# Altium PCB PCB1.PcbDoc
Units mil, origin at the board's own origin, x right, y up, seen from the top; angles counter-clockwise.
Board outline 5200 x 1900 mil, 4 copper layers (Top Layer, GND Layer, 3V3 Layer, Bottom Layer), stack 23.756 mil thick; 43 components, 37 nets, 201 pads, 48 vias.
Unrouted connection lines stored in the file: 114.
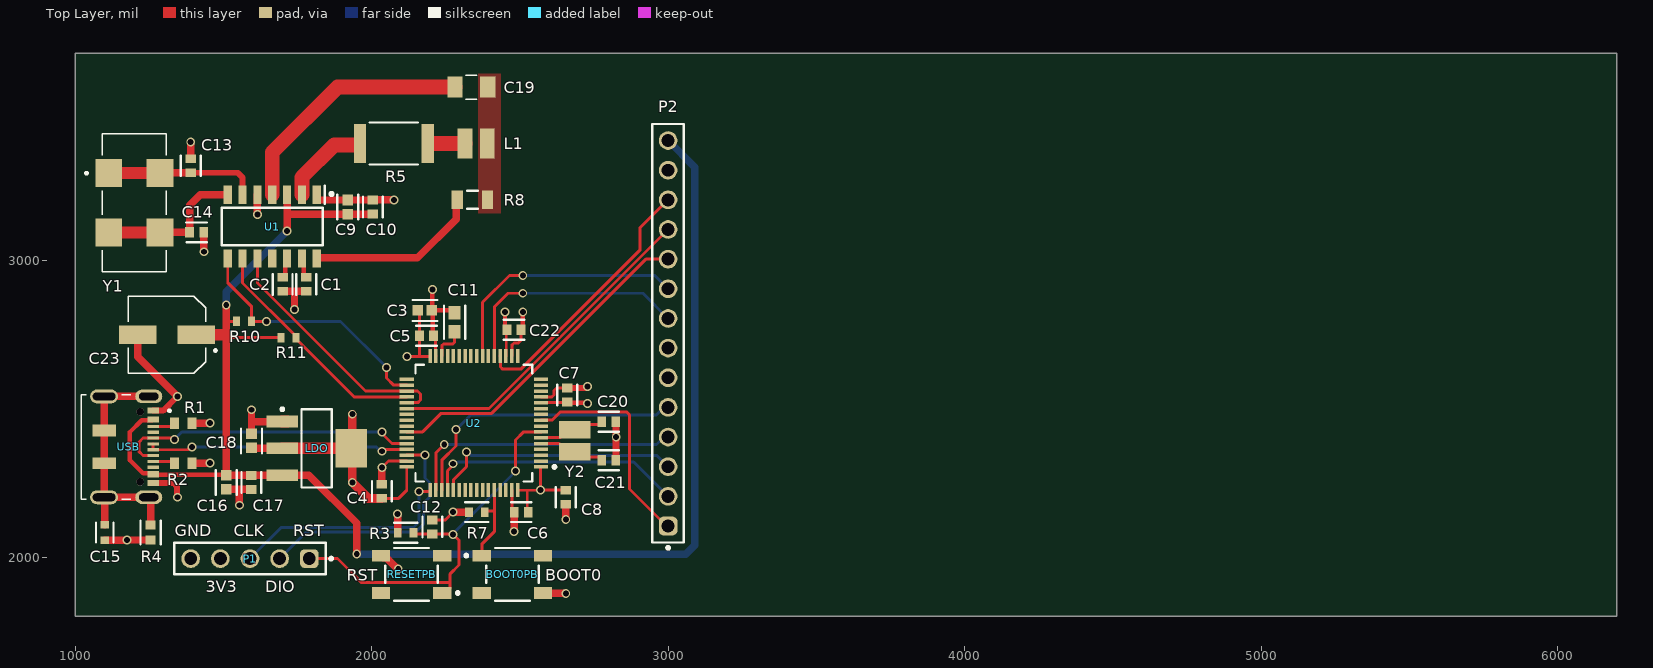
[diagram p0: Top Layer view]
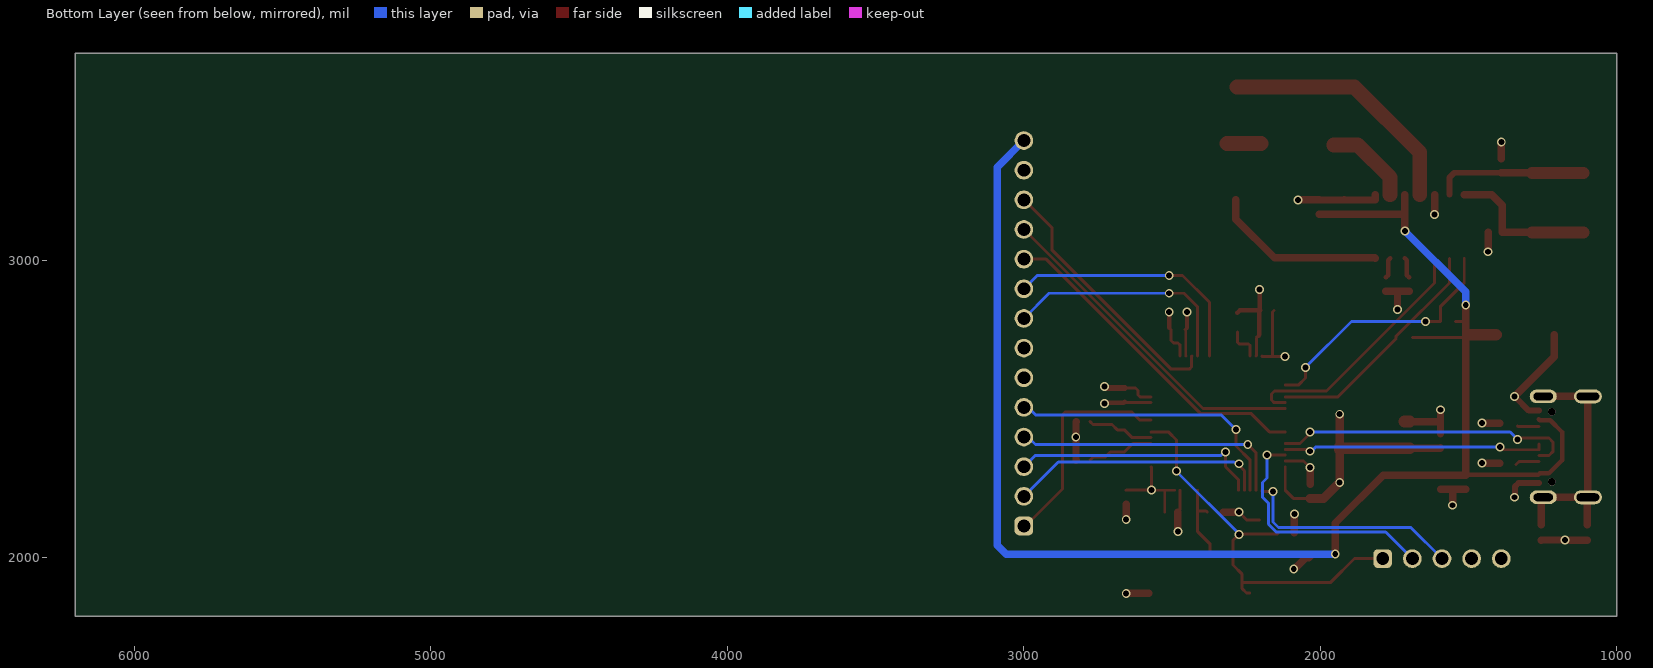
[diagram p1: Bottom Layer view, seen from below]
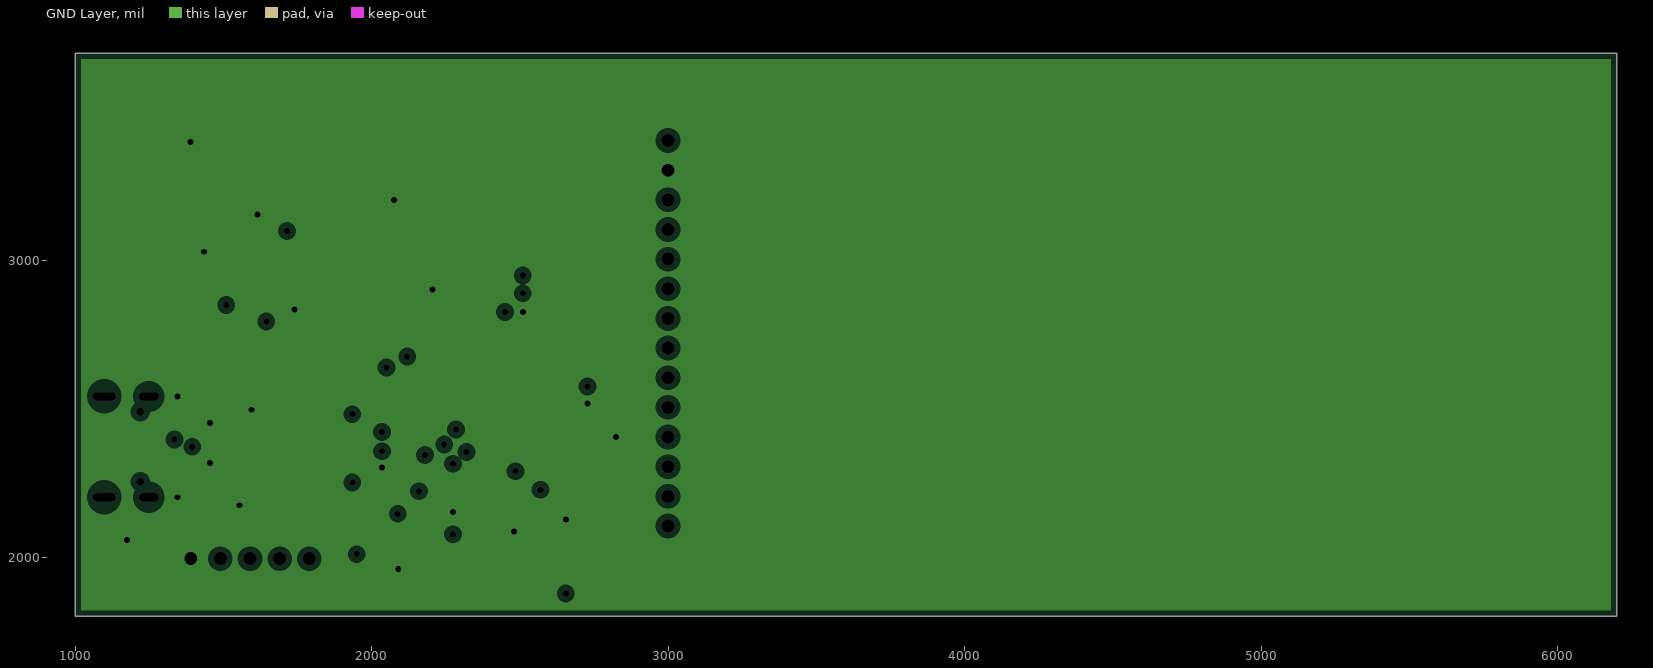
[diagram p2: GND Layer, clearances drawn from the general rule]
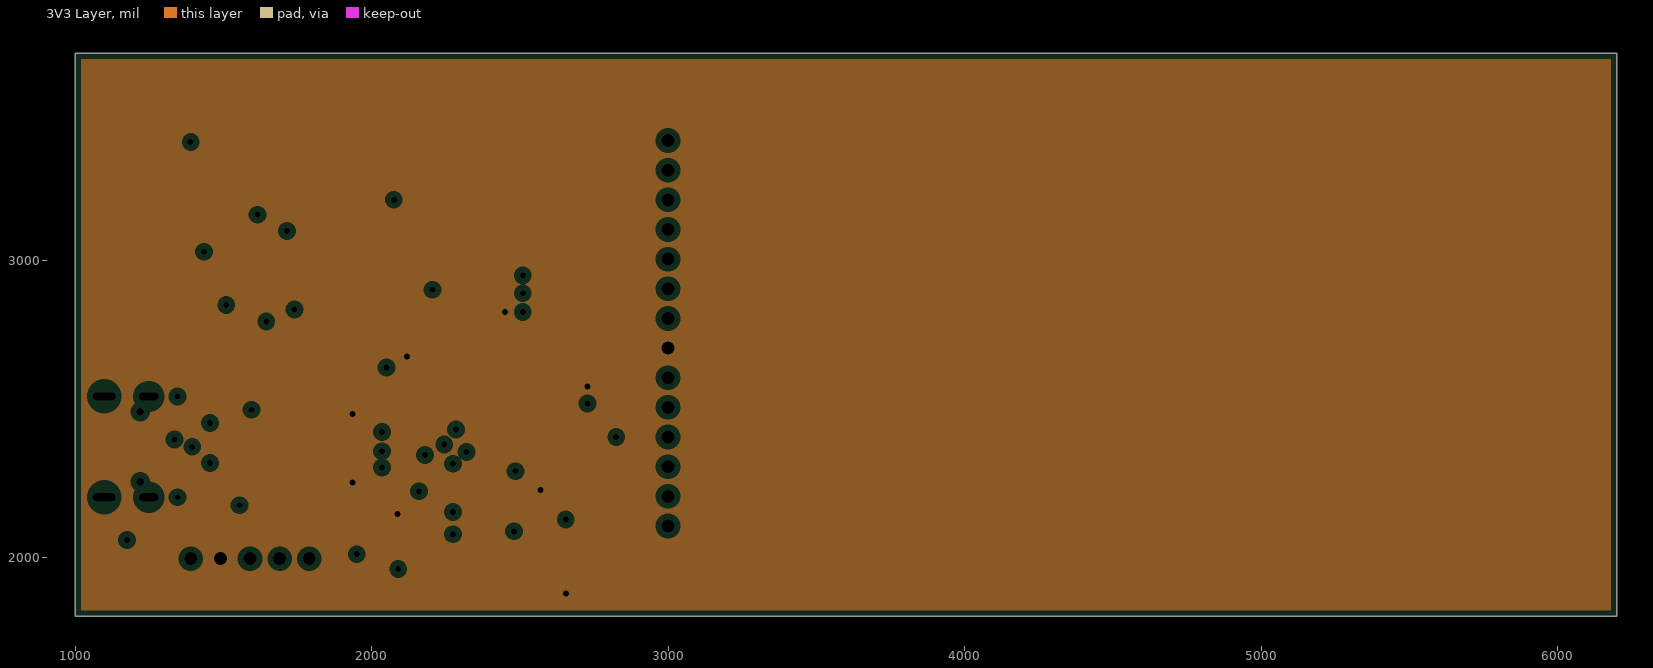
[diagram p3: 3V3 Layer, clearances drawn from the general rule]
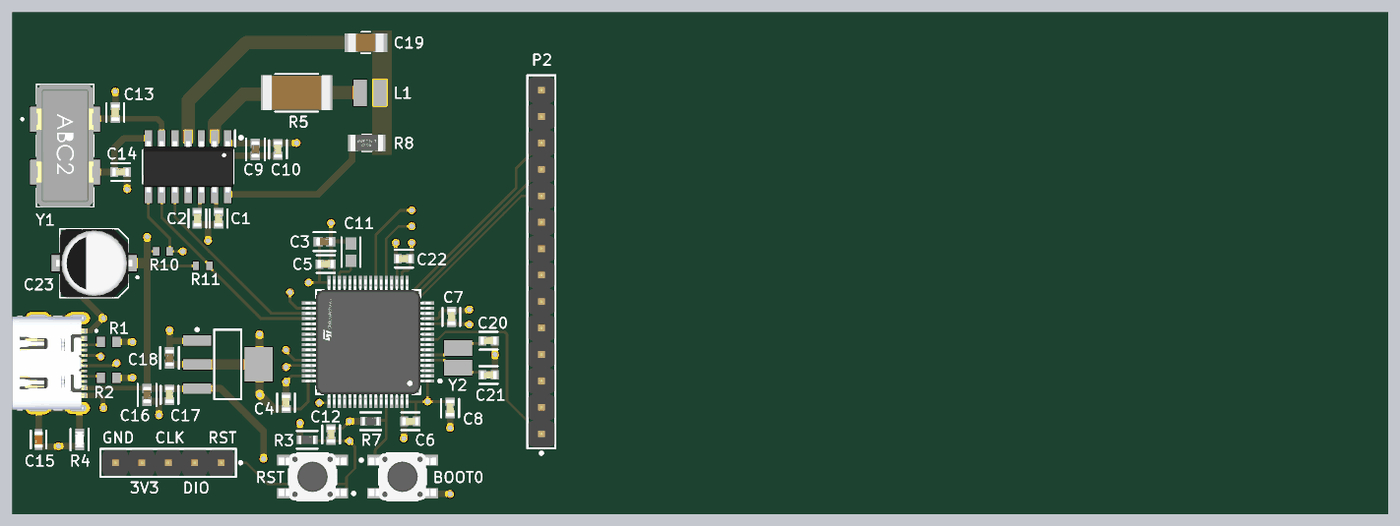
[diagram p4: 3D render of the assembled board from above, using the file's embedded part models]

## Layer stack, top to bottom
Top Solder: solder mask 0.4, Solder Resist, Dk 3.5
Top Layer: signal copper 1.4
Dielectric 2: prepreg 2.8, PP-006, Dk 4.1
GND Layer: plane copper 1.378, net GND
Dielectric 1: dielectric 12.6, FR-4, Dk 4.8
3V3 Layer: plane copper 1.378, net 3V3
Dielectric 3: prepreg 2.8, PP-006, Dk 4.1
Bottom Layer: signal copper 1.4
Bottom Solder: solder mask 0.4, Solder Resist, Dk 3.5

## Board outline
1000,1800 1000,3700 6200,3700 6200,1800

## Design rules (kind name [scope] priority, off if disabled: settings)
Clearance [All] p1: gap=5 ignorepadtopadclearanceinfootprint=FALSE
MinimumSolderMaskSliver [All] p1: minsoldermaskwidth=3.5
PlaneClearance [All] p1: clearance=20
PlaneConnect [All] p1: planeconnectstyle=Relief reliefexpansion=20 reliefentries=4 reliefconductorwidth=20 reliefairgap=10
PolygonConnect [All] p1: connectstyle=Direct reliefconductorwidth=10 reliefentries=4 polygonreliefangle="90 Angle" airgapwidth=10
RoutingVias [All] p1: holewidth=20 width=30 viastyle="Through Hole" minholewidth=10 minwidth=15 maxholewidth=30 maxwidth=40
SilkToSilkClearance [All] p1: silktosilkclearance=5
SilkToSolderMaskClearance [IsPad] p1: minsilkscreentomaskgap=3 clearancetoexposedcopper=TRUE
SolderMaskExpansion [All] p1: expansion=4 istentingtop=FALSE
SupplyNets "Schematic Supply Nets" [InNet('GND')] p1: voltage=0.000
Width "Power Width" [InNet('3V3') or InNet('GND') or InNet('USB5V') or InNet('USBSHLD')] p1: maxlimit=300 minlimit=10 preferedwidth=25
Width [All] p2: maxlimit=300 minlimit=10 preferedwidth=10
25 further rules are at their usual default settings.

## Components (designator, comment, footprint, x,y, rotation, side; value= is the part's Value field where it differs from the comment)
BOOT0PB "PTS647SM38SMTR2LFS" FP-PTS647SM38SMTR2LFS-MFG 2475,1942 r0 top
C1 "C0603C104K5RACTU" FP-C0603C-CF-MFG 1780,2920 r270 top value="0.10 μF"
C2 "C0603C104K5RACTU" FP-C0603C-CF-MFG 1700,2920 r270 top value="0.10 μF"
C3 "GRM188R6YA106MA73D" FP-GRM188-0_2-IPC_C 2180,2832 r0 top
C4 "C0603C104K5RACTU" FP-C0603C-CF-MFG 2035,2222 r90 top value="0.10 μF"
C5 "C0603C104K5RACTU" FP-C0603C-CF-MFG 2185,2747 r0 top value="0.10 μF"
C6 "C0603C104K5RACTU" FP-C0603C-CF-MFG 2505,2152 r180 top value="0.10 μF"
C7 "C0603C104K5RACTU" FP-C0603C-CF-MFG 2660,2547 r270 top value="0.10 μF"
C8 "C0603C104K5RACTU" FP-C0603C-CF-MFG 2655,2202 r270 top value="0.10 μF"
C9 "GRM188R6YA106MA73D" FP-GRM188-0_2-IPC_C 1919.31,3180.69 r90 top
C10 "C0603C104K5RACTU" FP-C0603C-CF-MFG 2004.31,3180.69 r90 top value="0.10 μF"
C11 "CL10A225KO8NNNC" FP-CL10-IPC_A 2280,2792 r90 top
C12 "C0603C104K5RACTU" FP-C0603C-CF-MFG 2205,2102 r90 top value="0.10 μF"
C13 "C0603C330J5GACTU" FP-C0603C-CF-MFG 1390,3320 r90 top value="33 pF"
C14 "C0603C330J5GACTU" FP-C0603C-CF-MFG 1410,3095 r0 top value="33 pF"
C15 "GRM1885C1H472JA01D" FP-GRM188-0_1-e0_2_0_5-MFG 1100,2083 r270 top
C16 "GRM188R6YA106MA73D" FP-GRM188-0_2-IPC_C 1510,2252 r270 top
C17 "C0603C104K5RACTU" FP-C0603C-CF-MFG 1595,2252 r270 top value="0.10 μF"
C18 "GRM188R6YA106MA73D" FP-GRM188-0_2-IPC_C 1595,2392 r90 top
C19 "C1206C472FBGACTU" CAPC340180_110N_KEM 2336.22,3585 r0 top
C20 "C0603C100J5GACTU" FP-C0603C-CF-MFG 2800,2457 r0 top value="10 pF"
C21 "C0603C100J5GACTU" FP-C0603C-CF-MFG 2800,2327 r0 top value="10 pF"
C22 "C0603C104K5RACTU" FP-C0603C-CF-MFG 2480,2767 r0 top value="0.10 μF"
C23 "EEEFK1C470P" CAP_EEEFK1C470P 1310,2750 r180 top value=47uF
L1 "CP-345UH-ID20" CP-345UH-ID20 2435,3295 r90 top
LDO "LD1117AS33TR" SOT-223_M 1815,2367 r0 top
P1 "61300511121" 61300511121 1590,1995 r180 top
P2 "61301411121" 61301411121 3000,2755 r90 top
R1 "RC0603FR-075K1L" RESC1608X55X25ML10T15 1365,2452 r180 top
R2 "RC0603FR-075K1L" RESC1608X55X25ML10T15 1365,2317 r180 top
R3 "RC0603FR-0710KL" FP-RC0603-0_55-IPC_C 2115,2082 r0 top
R4 "ERJ-3EKF1004V" FP-ERJ3EK-IPC_C 1255,2083 r270 top
R5 "352115RFT" RES_352115RFT_TEC 2075,3395 r0 top
R7 "RC0603FR-0710KL" FP-RC0603-0_55-IPC_C 2355,2152 r0 top
R8 "CRGCQ1206F330K" FP-CRGCQ1206-IPC_C 2340,3205 r180 top value=330KΩ
R10 "RC0603FR-072K2L" RESC1608X55X25LL10T15 1570,2795 r180 top
R11 "RC0603FR-072K2L" RESC1608X55X25LL10T15 1720,2740 r0 top
RESETPB "PTS647SM38SMTR2LFS" FP-PTS647SM38SMTR2LFS-MFG 2135,1942 r180 top
U1 "PCF7991AT_1081_M_1" SOIC127P600X175-14N 1665,3115 r270 top
U2 "STM32F401RET6" FP-LQFP64-5W-MFG 2345,2452 r180 top
USB "DX07S016JA1R1500" JAE_DX07S016JA1R1500 1220,2372 r270 top
Y1 "ABC2-4.000MHZ-4-T" XTAL_ABC2-4.000MHZ-4-T 1200,3195 r0 top
Y2 "NX3225GD-8MHZ-STD-CRA-3" NDK-NX3225GD-8MHZ-STD-CRA-3_V 2685,2392 r270 top

## Footprints (in the part's own frame and the unit in brackets; to place one, negate y for a bottom-side part, rotate by r counter-clockwise, add the part's x,y. Pads: shape width x height; smd on the part's side, far side on the other; paste and mask are expansions set on the pad)
61300511121 [mm] "Pin Header, pitch 2.54 mm, THT, Vertical, single row, 5p"
  rrect50% 1.6x1.6 hole 1.1: 1(-5.08,0)
  round 1.6 hole 1.1: 2(-2.54,0) 3(0,0) 4(2.54,0) 5(5.08,0)
  silkscreen extent -7.07,-1.35 6.5,1.35, body extent -6.35,-1.27 6.35,1.27, height 8.57
61301411121 [mm] "Pin Header, pitch 2.54 mm, THT, Vertical, single row, 14p"
  rrect50% 1.6x1.6 hole 1.1: 1(-16.51,0)
  round 1.6 hole 1.1: 2(-13.97,0) 3(-11.43,0) 4(-8.89,0) 5(-6.35,0) 6(-3.81,0) 7(-1.27,0) 8(1.27,0) 9(3.81,0) 10(6.35,0) 11(8.89,0) 12(11.43,0) 13(13.97,0) 14(16.51,0)
  silkscreen extent -18.5,-1.35 17.93,1.35, body extent -17.78,-1.27 17.78,1.27, height 8.57
CAP_EEEFK1C470P [mm]
  rect 3.2x1.6 smd: 1(-2.5,0) 2(2.5,0)
  silkscreen extent -4.25,-3.3 3.3,3.3, body extent -3.65,-3.3 3.65,3.3, height 5.8
CAPC340180_110N_KEM [mm]
  rect 1.306x1.8 smd paste+0 mask+0: 1(-1.403,0) 2(1.403,0)
  silkscreen extent -0.44,-1.03 0.44,1.03, body extent -1.7,-0.9 1.7,0.9, height 1.1
CP-345UH-ID20 [mil]
  rect 100x50 smd: 1(100,120) 2(100,45)
FP-C0603C-CF-MFG [mm]
  rect 0.75x0.9 smd paste+0 mask+0: 1(-0.6,0) 2(0.6,0)
  silkscreen extent -0.87,-0.85 0.88,0.85, body extent -1.2,-0.6 1.2,0.6, height 0.25
FP-CL10-IPC_A [mil]
  rect 45.6x39.85 smd paste+0 mask+0: 1(-32.56,0) 2(32.56,0)
  silkscreen extent -55,-36 55,36, body extent -75,-40 75,40, height 10
FP-CRGCQ1206-IPC_C [mil]
  rect 37.64x63.38 smd paste+0 mask+0: 1(-51.22,0) 2(51.22,0)
  silkscreen extent -18,-31 18,31, body extent -74,-37 74,37, height 10
FP-ERJ3EK-IPC_C [mil]
  rect 29.78x33.94 smd paste+0 mask+0: 1(-25.62,0) 2(25.62,0)
  silkscreen extent -41,-34 41,34, body extent -44,-23 44,23, height 10
FP-GRM188-0_1-e0_2_0_5-MFG [mm]
  rect 0.65x0.7 smd paste+0 mask+0: 1(-0.675,0) 2(0.675,0)
  silkscreen extent -0.85,-0.75 0.85,0.75, body extent -1.1,-0.55 1.1,0.55, height 0.25
FP-GRM188-0_2-IPC_C [mil]
  rect 35.63x35.68 smd paste+0 mask+0: 1(-23.64,0) 2(23.64,0)
  silkscreen extent -41,-35 41,35, body extent -45,-24 45,24, height 10
FP-LQFP64-5W-MFG [mm]
  rect 1.2x0.3 smd paste+0 mask+0: 1(-5.75,3.75) 2(-5.75,3.25) 3(-5.75,2.75) 4(-5.75,2.25) 5(-5.75,1.75) 6(-5.75,1.25) 7(-5.75,0.75) 8(-5.75,0.25) 9(-5.75,-0.25) 10(-5.75,-0.75) 11(-5.75,-1.25) 12(-5.75,-1.75) 13(-5.75,-2.25) 14(-5.75,-2.75) 15(-5.75,-3.25) 16(-5.75,-3.75) 33(5.75,-3.75) 34(5.75,-3.25) 35(5.75,-2.75) 36(5.75,-2.25) 37(5.75,-1.75) 38(5.75,-1.25) 39(5.75,-0.75) 40(5.75,-0.25) 41(5.75,0.25) 42(5.75,0.75) 43(5.75,1.25) 44(5.75,1.75) 45(5.75,2.25) 46(5.75,2.75) 47(5.75,3.25) 48(5.75,3.75)
  rect 0.3x1.2 smd paste+0 mask+0: 17(-3.75,-5.75) 18(-3.25,-5.75) 19(-2.75,-5.75) 20(-2.25,-5.75) 21(-1.75,-5.75) 22(-1.25,-5.75) 23(-0.75,-5.75) 24(-0.25,-5.75) 25(0.25,-5.75) 26(0.75,-5.75) 27(1.25,-5.75) 28(1.75,-5.75) 29(2.25,-5.75) 30(2.75,-5.75) 31(3.25,-5.75) 32(3.75,-5.75) 49(3.75,5.75) 50(3.25,5.75) 51(2.75,5.75) 52(2.25,5.75) 53(1.75,5.75) 54(1.25,5.75) 55(0.75,5.75) 56(0.25,5.75) 57(-0.25,5.75) 58(-0.75,5.75) 59(-1.25,5.75) 60(-1.75,5.75) 61(-2.25,5.75) 62(-2.75,5.75) 63(-3.25,5.75) 64(-3.75,5.75)
  silkscreen extent -7.02,-5 5,5, body extent -6.45,-6.45 6.45,6.45, height 0.25
FP-PTS647SM38SMTR2LFS-MFG [mm]
  rect 1.55x1 smd paste+0 mask+0: 1(-2.625,1.6) 2(2.625,1.6) 3(-2.625,-1.6) 4(2.625,-1.6)
  silkscreen extent -4.07,-2.25 2.25,2.25, body extent -3.5,-2.42 3.5,2.42, height 0.25
FP-RC0603-0_55-IPC_C [mil]
  rect 25.93x31.97 smd paste+0 mask+0: 1(-26.64,0) 2(26.64,0)
  silkscreen extent -40,-33 40,33, body extent -44,-22 44,22, height 10
JAE_DX07S016JA1R1500 [mm]
  rect 0.52x1 smd mask+0.051: 1(-3.1,1.1) 2(-2.35,1.1) 11(2.35,1.1) 12(3.1,1.1)
  rect 0.27x1 smd mask+0.051: 3(-1.75,1.1) 4(-1.25,1.1) 5(-0.75,1.1) 6(-0.25,1.1) 7(0.25,1.1) 8(0.75,1.1) 9(1.25,1.1) 10(1.75,1.1)
  rect 1x2 smd: S1(-1.4,-3.1) S2(1.4,-3.1)
  oval 1.158x2.316 hole 0.65 slot 1.65 at 90 deg: S3(-4.32,0.725) S4(4.32,0.725)
  oval 1.2x2.4 hole 0.65 slot 1.95 at 90 deg: S5(-4.32,-3.1) S6(4.32,-3.1)
  round 0.63 hole 0.63 unplated: ""(-3,0) ""(3,0)
  silkscreen extent -4.47,-5.05 4.47,2.6, body extent -4.47,-5.56 4.47,1.35, height 3.31
NDK-NX3225GD-8MHZ-STD-CRA-3_V [mm] "SMD, 2-Leads, Body 3.2x2.5mm"
  rect 1.5x2.7 smd: 1(-0.95,0) 2(0.95,0)
  body extent -1.6,-1.25 1.6,1.25, height 1
RES_352115RFT_TEC [mil]
  rect 41x132 smd paste+0 mask+0: 1(-114.47,0) 2(114.47,0)
  silkscreen extent -82,-71 82,71, body extent -127,-66 127,66, height 26
RESC1608X55X25LL10T15 [mm] "Chip Resistor, 2-Leads, Body 1.60x0.80mm, IPC High Density"
  rect 0.6x0.8 smd: 1(-0.65,0) 2(0.65,0)
  body extent -0.85,-0.45 0.85,0.45, height 0.55
RESC1608X55X25ML10T15 [mm] "Chip Resistor, 2-Leads, Body 1.60x0.80mm, IPC Low Density"
  rect 0.8x1 smd: 1(-0.75,0) 2(0.75,0)
  body extent -0.85,-0.45 0.85,0.45, height 0.55
SOIC127P600X175-14N [mm]
  rect 1.55x0.7 smd: 1(-2.725,3.81) 2(-2.725,2.54) 3(-2.725,1.27) 4(-2.725,0) 5(-2.725,-1.27) 6(-2.725,-2.54) 7(-2.725,-3.81) 8(2.725,-3.81) 9(2.725,-2.54) 10(2.725,-1.27) 11(2.725,0) 12(2.725,1.27) 13(2.725,2.54) 14(2.725,3.81)
  silkscreen extent -3.5,-4.33 1.6,4.51, body extent -3.03,-4.33 3.03,4.33, height 0.67
SOT-223_M [mm] "SOT223, 4-Leads, Body 6.5x3.5mm, Pitch 2.3mm, Lead Span 7mm, IPC Low Density"
  rect 2.7x1 smd: 1(-2.95,2.3) 2(-2.95,0) 3(-2.95,-2.3)
  rect 2.7x3.3 smd: 4(2.95,0)
  silkscreen extent -3.07,-3.35 1.3,3.47, body extent -1.85,-3.35 1.85,3.35, height 1.8
XTAL_ABC2-4.000MHZ-4-T [mm]
  rect 2.3x2.4 smd: 1(-2.2,2.54) 2(-2.2,-2.54) 3(2.2,-2.54) 4(2.2,2.54)
  silkscreen extent -4.2,-5.9 2.75,5.9, body extent -2.75,-5.9 2.75,5.9, height 2.09

## Part data
BOOT0PB RESETPB: library part CMP-10040-000031-1, "TACT 4.5 X 4.5, 3.8 MM H, 1.8N,", Max Operating Temperature=70°C, Min Operating Temperature=-20°C, Operating Force=180gf, Ratings=IP40, Actuator Type=Standard, Illumination Type=Non-Illuminated, Mechanical Life=100000Cycles, Mount="Surface Mount", Packaging="Cut Tape", Switch Function=Off-Mom, Switch Travel=0.25mm, Termination="Gull Wing", Throw Configuration=SPST
C1 C2 C4 C5 C6 C7 C8 C10 C12 C17 C22: library part CMP-2006-03061-2, "CAP CER 0.1UF 50V X7R 0603", Capacitance=100nF, Manufacturer=KEMET, Package=C0603C-CF, Temperature="-55°C to +125°C", Temperature Characteristic=X7R, Temperature Coefficient=30ppm/°C, Temperature Range High=+125°C, Temperature Range Low=-55°C, Tolerance=0.1, Voltage Rating="50 V", Automotive=Yes, Automotive Grade="Grade 1", Category=Cap, ComponentLink2Description=Datasheet, ComponentLink2URL=https://api.kemet.com/component-edge/download/datasheet/C0603C100J5GACAUTO.pdf, Device Class L1="Passive Components", Device Class L2=Capacitors, Device Class L3="Ceramic Capacitors", Digikey Description="CAP CER 0.1UF 50V X7R 0603", Height=0.87mm, Lead Free=Yes, Manufacturer Part Number=C0603C104K5RACTU, Material=Ceramic, Octopart=https://octopart.com/c0603c104k5ractu-kemet-139244, RoHS=TRUE
C3 C9 C16 C18: library part CMP-06035-045466-1, "Chip Multilayer Ceramic Capacitors for General Purpose, 0603, 10uF, X5R, 15%, 20%, 35V", Capacitance=10uF, Case Code (Imperial)=0603, Case Code (Metric)=1608, Dielectric=X5R, Max Operating Temperature=85°C, Min Operating Temperature=-55°C, Tolerance=20%, Voltage Rating=35V, Case/Package=0603, Length=0.063inch, Mount="Surface Mount", Packaging="Tape and Reel", Thickness=0.039inch, Voltage Rating (DC)=35V, Width=0.031inch
C11: library part CMP-13271-000835-1, "Cap Ceramic 2.2uF 16V X5R ±10% Pad SMD 0603 +85°C T/R", Capacitance=2.2uF, Case Code (Imperial)=0603, Case Code (Metric)=1608, Dielectric=X5R, Max Operating Temperature=85°C, Min Operating Temperature=-55°C, Package Quantity=4000, Tolerance=10%, Voltage=16V, Case/Package=0603, Contact Plating=Tin, Depth=0.8mm, Height=0.8mm, Lead Free="Lead Free", Length=1.6mm, Material=Ceramic, Mount="Surface Mount", Packaging="Tape and Reel", Radiation Hardening=No, Thickness=0.035inch, Voltage Rating=16V, Voltage Rating (DC)=16V, Width=0.031inch
C13 C14: library part CMP-2006-03168-3, "Capacitor; Ceramic; Cap; 33.0pF; Tol 5%; SMT; Vol-Rtg 50V; C0G; Tape and Reel", Capacitance="33 pF", Manufacturer=KEMET, Package=C0603C-CF, Temperature="-55°C to +125°C", Temperature Characteristic=C0G, Temperature Coefficient=30ppm/°C, Temperature Range High=+125°C, Temperature Range Low=-55°C, Tolerance=0.05, Voltage Rating="50 V", Automotive=Yes, Automotive Grade="Grade 1", Category=Cap, ComponentLink2Description=Datasheet, ComponentLink2URL=https://api.kemet.com/component-edge/download/datasheet/C0603C100J5GACAUTO.pdf, Device Class L1="Passive Components", Device Class L2=Capacitors, Device Class L3="Ceramic Capacitors", Digikey Description="Capacitor; Ceramic; Cap; 33.0pF; Tol 5%; SMT; Vol-Rtg 50V; C0G; Tape and Reel", Height=0.87mm, Lead Free=Yes, Manufacturer Part Number=C0603C330J5GACTU, Material=Ceramic, Mouser Description="Capacitor; Ceramic; Cap; 33.0pF; Tol 5%; SMT; Vol-Rtg 50V; C0G; Tape and Reel", Octopart=https://octopart.com/c0603c330j5gactu-kemet-87666, RoHS=TRUE
C15: library part CMP-2006-02564-2, "Chip Multilayer Ceramic Capacitors for General Purpose, 0603, 4700pF, C0G, 30ppm/°C, 5%, 50V", Capacitance=4.7nF, Case Code (Imperial)=0603, Case Code (Metric)=1608, Dielectric=C0G, Max Operating Temperature=125°C, Min Operating Temperature=-55°C, Package Quantity=4000, Tolerance=5%, Voltage Rating=50V, Case/Package=0603, Height=0.8mm, Lead Free="Lead Free", Length=1.6mm, Material=Ceramic, Mount="Surface Mount", Packaging="Tape and Reel", REACH SVHC="No SVHC", Termination=SMD/SMT, Thickness=0.035inch, Voltage Rating (DC)=50V, Width=0.8mm
C19: library part CMP-001-00090-1, "SMD Comm C0G HV, Ceramic, 4700 pF, 1%, 630 VDC, C0G, SMD, MLCC, Ultra-Stable, Low Loss, Class I, 1206", Manufacturer_Name=Kemet, Copyright="Copyright (C) 2026 Ultra Librarian. All rights reserved.", Datasheet=https://content.kemet.com/datasheets/KEM_C1009_C0G_HV_SMD.pdf, Design Item ID=C1206C472FBGACTU, Manufacturer_Part_Number=C1206C472FBGACTU, Parameter 1=4.7nF, Source=C1206C472FBGACTU.SchLib
C20 C21: library part CMP-2006-02999-3, "CAP CER 10PF 50V C0G/NP0 0603", Capacitance="10 pF", Manufacturer=KEMET, Package=C0603C-CF, Temperature="-55°C to +125°C", Temperature Characteristic=C0G, Temperature Coefficient=30ppm/°C, Temperature Range High=+125°C, Temperature Range Low=-55°C, Tolerance=0.05, Voltage Rating="50 V", Automotive=Yes, Automotive Grade="Grade 1", Category=Cap, ComponentLink2Description=Datasheet, ComponentLink2URL=https://api.kemet.com/component-edge/download/datasheet/C0603C100J5GACAUTO.pdf, Device Class L1="Passive Components", Device Class L2=Capacitors, Device Class L3="Ceramic Capacitors", Digikey Description="CAP CER 10PF 50V C0G/NP0 0603", Height=0.87mm, Lead Free=Yes, Manufacturer Part Number=C0603C100J5GACTU, Material=Ceramic, Mouser Description="Multilayer Ceramic Capacitors MLCC - SMD/SMT 50volts 10pF C0G 5%", Octopart=https://octopart.com/c0603c100j5gactu-kemet-138281, RoHS=TRUE
C23: "47ÂµF 16V Aluminum Electrolytic Capacitors Radial, Can - SMD 2000 Hrs @ 105Â°C", Package="RADIAL-2 Panasonic", Check_prices=https://www.snapeda.com/parts/EEE-FK1C470P/Panasonic/view-part/?ref=eda, MF="Panasonic Electronic", MP=EEE-FK1C470P, SnapEDA_Link=https://www.snapeda.com/parts/EEE-FK1C470P/Panasonic/view-part/?ref=snap
LDO: library part CMP-0244-00316-1, "1A, Low Drop Positive Voltage Regulator, 3.3V, 4-Pin SOT-223, Tape and Reel", ComponentLink1Description="Manufacturer URL", ComponentLink1URL=http://www.st.com, ComponentLink2Description=Datasheet, ComponentLink2URL=http://www.st.com/internet/com/TECHNICAL_RESOURCES/TECHNICAL_LITERATURE/DATASHEET/CD00002116.pdf, DatasheetVersion=2/12/2011, PackageDescription="4-Pin SOT-223 Package, 6.5 x 3.5 mm Body, 2.3 mm Pitch, 7 mm Lead Span", PackageReference=SOT-223, PackageVersion=2010
P1: library part CMP-1502-01068-4, "THT Vertical Pin Header WR-PHD, Pitch 2.54 mm, Single Row, 5 pins", Color=Black, Contact Resistance=20mΩ, Current Rating=3A, Max Operating Temperature=105°C, Min Operating Temperature=-40°C, Operating Supply Voltage=250V, Connector Type="Male Pin", Contact Material=Gold, Contact Mating Length=5.9944mm, Contact Plating=Gold, Gender=Male, Height=8.89mm, Lead Free="Lead Free", Lead Pitch=2.54mm, Mount="Through Hole", Number of Contacts=5, Number of Pins=5, Number of Positions=5, Number of Rows=1, Orientation=Vertical, Packaging=Bulk, Pitch=2.54mm, RoHS=Compliant, Termination=Solder, Voltage Rating=250V
P2: library part CMP-1502-01091-4, "THT Vertical Pin Header WR-PHD, Pitch 2.54 mm, Single Row, 14 pins", Color=Black, Contact Resistance=20mΩ, Current Rating=3A, Max Operating Temperature=105°C, Min Operating Temperature=-40°C, Operating Supply Voltage=250V, Connector Type="Male Pin", Contact Material=Gold, Contact Mating Length=5.9944mm, Contact Plating=Gold, Gender=Male, Height=8.89mm, Lead Free="Lead Free", Lead Pitch=2.54mm, Mount="Through Hole", Number of Contacts=14, Number of Pins=14, Number of Positions=14, Number of Rows=1, Orientation=Vertical, Packaging=Bulk, Pitch=2.54mm, RoHS=Compliant, Termination=Solder, Voltage Rating=250V
R1 R2: library part CMP-2000-04091-1, Manufacturer=Yageo, Parameter 1=5.1kR, Part Number=RC0603FR-075K1L
R3 R7: library part CMP-2100-03664-2, "RES 10K OHM 1% 1/10W 0603", Case Code (Imperial)=0603, Case Code (Metric)=1608, Max Operating Temperature=155°C, Max Power Dissipation=100mW, Min Operating Temperature=-55°C, Resistance=10kR, Resistance Tolerance=1%, Resistor Type="Thick Film", Temperature Coefficient=100ppm/°C, Voltage Rating=75V, Voltage Rating (DC)=50V, Case/Package=0603, Construction=Rectangular, Depth=0.8mm, Features="Moisture Resistant", Height=0.45mm, Lead Free="Lead Free", Lead Pitch=0.3mm, Length=1.6mm, Military Standard=Not, Number of Pins=2, Number of Terminations=2, Packaging="Tape and Reel", Power Rating=100mW, RoHS Compliant=Yes, Series=RC, Size Code=0603, Termination=SMD/SMT, Tolerance=1%, Weight=7.1E-05oz, Width=0.8mm
R4: library part CMP-1012-00849-3, "RES SMD 1M OHM 1% 1/10W 0603", Case Code (Imperial)=0603, Case Code (Metric)=1608, Max Operating Temperature=155°C, Max Power Dissipation=100mW, Min Operating Temperature=-55°C, Package Quantity=1, Resistance=1MR, Resistance Tolerance=1%, Resistor Type="Thick Film", Temperature Coefficient=100ppm/°C, Voltage Rating=75V, Case/Package=0603, Construction=Rectangular, Contact Plating=Tin, Depth=0.8mm, Features="Automotive AEC-Q200", Height=0.022inch, Lead Free="Lead Free", Length=1.6mm, Military Standard=Not, Mount="Surface Mount", Number of Pins=2, Number of Terminations=2, Packaging="Tape and Reel", Power Rating=100mW, Radiation Hardening=No, REACH SVHC="No SVHC", RoHS Compliant=Yes, Series=ERJ, Size Code=0603, Termination=SMD/SMT, Tolerance=1%, Voltage Rating (DC)=75V, Width=0.8mm
R5: library part CMP-009-00183-1, "3521 15R 1% 2W", Manufacturer_Name="TE Connectivity", Copyright="Copyright (C) 2026 Ultra Librarian. All rights reserved.", Datasheet=https://www.te.com/commerce/DocumentDelivery/DDEController?Action=srchrtrv&DocNm=9-1773463-5&DocType=Data+Sheet&DocLang=English&PartCntxt=2176070-5&DocFormat=pdf, Design Item ID=352115RFT, Manufacturer_Part_Number=352115RFT, Parameter 1=15R, Source=352115RFT.SchLib
R8: library part CMP-03211-007819-1, "CRGCQ1206 330KΩ 0.25W 1% ±100ppm/°C 200V", Ambient Temperature Range High=+70°C, Manufacturer="TE Connectivity", Package=CRGCQ1206, Power Rating=0.25W, Resistance=330KΩ, Temperature="-55°C to +155°C", Temperature Coefficient=±100ppm/°C, Temperature Range High=+155°C, Temperature Range Low=-55°C, Tolerance=0.01, Voltage Rating=200V, Automotive=Yes, Automotive Grade="Grade 1255", Category=Res, ComponentLink2Description=Datasheet, ComponentLink2URL=https://www.te.com/commerce/DocumentDelivery/DDEController?Action=showdoc&DocId=Data+Sheet%7F1773204-3%7F1%7Fpdf%7FEnglish%7FENG_DS_1773204-3_1.pdf%7F4-2176347-1264, Composition="Thick Film", Device Class L1="Passive Components", Device Class L2=Resistors, Device Class L3="Chip SMD Resistors", Height=0.65mm, Ipc Land Pattern Name=RESC310155X55, Lead Free=Yes, Manufacturer Part Number=CRGCQ1206F330K, Octopart=https://octopart.com/crgcq1206f330k-te+connectivity-91018273, RoHS=TRUE, Series=CRGCQ
R10 R11: library part CMP-2000-06934-1, "Thick Film Resistor, 2.2 KOhm, 100 mW, 50 V, +/- 1%, -55 to 155 degC, 2-Pin SMD (0603), RoHS, Tape and Reel", Case Code - in=0603, Case Code - mm=1608, Manufacturer=Yageo, Operating Temperature Range=-55Cto+155C, Package Description="2-Pin Surface Mount Device, Body 1.6 x 0.8 mm", Power Rating=100mW, Resistance=2.2kR, Temperature Coefficient=100PPM/C, Tolerance=1%, Voltage Rating=50V, Datasheet URL=http://www.yageo.com/documents/recent/PYu-RC_Group_51_RoHS_L_7.pdf, Datasheet Version="Rev. 7, 05/2017", Manufacturer URL=http://www.yageo.com/, Mounting Technology=SurfaceMount, Package Reference=0603, Packaging=Reel, Product=ThickFilmResistorsGeneralPurpose, Series=RC, Termination Style=SMD/SMT
U1: library part CMP-081-000000-1, "IC REMOTE KEYLESS ENTRY 14SOIC", Manufacturer_Name=NXP, Manufacturer_Part_Number=PCF7991AT/1081/M:1, Datasheet Link=https://www.farnell.com/datasheets/2353677.pdf, Design Item ID=PCF7991AT_1081_M_1, Geometry.Height=1.75mm, Source=PCF7991AT_1081_M_1.SchLib
U2: library part CMP-12105-000004-1, "IC MCU 32BIT 512KB FLASH 64LQFP", Ambient Temperature Range High=+85°C, Ambient Temperature Range Low=-40°C, Frequency=84MHz, Manufacturer=STMicroelectronics, Max Junction Temp=+105°C, Max Supply Voltage=3.6V, Min Supply Voltage=1.65V, Package=LQFP64-5W, Temperature="-40°C to +105°C", Automotive=No, Category=IC, ComponentLink2Description=Datasheet, ComponentLink2URL=https://www.st.com/resource/en/datasheet/stm32f401re.pdf, Core Architecture="ARM Cortex-M4", Data Bus Width=32bits, Device Class L1="Integrated Circuits (ICs)", Device Class L2="Embedded Processors and Controllers", Device Class L3=Microcontrollers, Digikey Description="IC MCU 32BIT 512KB FLASH 64LQFP", Height=1.6mm, Interface=I2C,SPI,USART,USB,IrDA,I2S,SMBus,Other, Ipc Land Pattern Name=QFP50P1200X1200X160-64, Lead Free=Yes, Manufacturer Part Number=STM32F401RET6, Memory Size=512KBytes, Memory Type=FLASH, Mouser Description="ARM Microcontrollers - MCU 16/32-BITS MICROS", Number Of A/D Converters=1, Number Of Adc Channels=12, Number Of Cores=1, Number Of I2C Channels=3, Number Of I/Os=50, Number Of Pwm Channels=23, Number Of Spi Channels=3, Number Of Timers/Counters=8, Number Of Uart Channels=3, Number Of Usb Channels=1, Octopart=https://octopart.com/stm32f401ret6-stmicroelectronics-34185993, Ram Size=96KBytes, RoHS=TRUE, Standoff Height=0.05mm, Temperature Range High=+105°C, Temperature Range Low=-40°C
USB: "USB-C (USB TYPE-C) USB 2.0 Receptacle Connector 24 (16+8 Dummy) Position Surface Mount, Right Angle; Through Hole", Package=None, Availability=Unavailable, MP=DX07S016JA1R1500, Price=None
Y1: Package=None, Availability=Unavailable, MP=ABC2-4.000MHZ-4-T, Price=None
Y2: library part CMP-2000-07595-1, "Crystal Unit, 8 MHz, 8 pF, -40 to 150 degC, 2-Pin SMD, RoHS, Tape and Reel", Case/Package=SMD/SMT, ESR (Equivalent Series Resistance)=500Ohm, Frequency=8MHz, Frequency Stability=150ppm, Frequency Tolerance=50ppm, Load Capacitance=8pF, Manufacturer=NDK, Max Operating Temperature=150degC, Min Operating Temperature=-40degC, Package Description="2-Pin Surface Mount Device, Body 3.2 x 2.5 mm", Package Quantity=3000, Datasheet URL=http://www.ndk.com/images/products/catalog/c_NX3225GD-STD-CRA-3_e.pdf, Datasheet Version=11/2016, Height=0.039inch, Length=0.126inch, Manufacturer URL=http://www.ndk.com/en/, Mount=SurfaceMount, Mounting Technology=SurfaceMount, Number of Pins=2, Package Reference=NX3225GD-8MHZ-STD-CRA-3, Packaging=TapeandReel, RoHSCompliant=True, Width=0.098inch
L1: Parameter 1=345uH

## Via types
v1: diameter 30, hole 20, Top Layer to Bottom Layer, 48 vias

## Nets (pads, with @x,y where several pads share a name; then routed paths per layer and width w, separated by ;. In a path a pad name is that pad's centre, name@x,y a point inside that pad or via, vN(x,y) a via of type N, cw(c..) or ccw(c..) an arc to the next point about the centre after c; other vN are vias at no path point)
3V3: BOOT0PB.4 C3.1 C4.1 C5.1 C6.1 C7.1 C8.1 C18.1 C22.1 LDO.2 LDO.4 P1.4 P2.7 R3.1 U2.1 U2.13 U2.19 U2.32 U2.48 U2.64 | length 1884.8
  Top Layer w10: C4.1 2091.38,2198.38 2118.62,2225.62 U2.48 ; v1(2120,2677) 2158.23,2677 ; C3.1 2161.38,2826.98 C5.1 2161.38,2680.15 2158.23,2677 ; U2.32 2197.36,2677.91 2196.46,2677 2158.23,2677 ; C22.1@2450,2773.38 C22.1 ; U2.19 2454.17,2679.28 C22.1@2454.17,2764.8 ; U2.64 2568.62,2225.62 v1(2570,2227) ; C6.1@2525,2152 2525,2222 ; U2.1 2570.91,2304.36 2570,2303.46 v1(2570,2227) ; U2.13 2608.58,2540.58 2615,2547 2615,2562 2623.62,2570.62 C7.1 ; C8.1 2654.31,2226.31 2570.69,2226.31 v1(2570,2227)
  Top Layer w15: C22.1@2450,2773.38 v1(2450,2827)
  Top Layer w20: C7.1 2720.92,2570.62 2725.29,2575 v1(2728,2575)
  Top Layer w25: C18.1 1595.68,2367.68 1698.18,2367.68 LDO.2 ; v1(2088,2146) 2088.18,2145.82 2088.18,2082.18 R3.1 ; BOOT0PB.4 2579.4,1877.96 2654.04,1877.96 v1(2655,1877)
  Top Layer w30: LDO.4@1935,2363.14 v1(1935,2252) 1988.62,2198.38 C4.1 ; LDO.4@1935,2370.86 v1(1935,2482)
  Top Layer w40: LDO.2 LDO.4 ; LDO.4@1935,2363.14 LDO.4 ; LDO.4@1935,2370.86 LDO.4
GND: C1.2 C2.2 C3.2 C4.2 C5.2 C6.2 C7.2 C8.2 C9.2 C10.2 C11.2 C12.2 C13.2 C14.2 C15.2 C16.2 C17.2 C18.2 C20.2 C21.2 C22.2 C23.2 LDO.1 P1.5 P2.13 R1.1 R2.1 R4.2 R7.1 RESETPB.4 U1.1 U1.5 U2.12 U2.18 U2.31 U2.47 U2.63 USB.1 USB.12 | length 3040.6
  Top Layer w10: v1(2035,2302) 2057.05,2324.05 U2.47 ; C12.2 2248.62,2125.62 v1(2275,2152) ; C5.2 2216.14,2739.48 2216.14,2679.28 U2.31 ; U2.63 2472.95,2207.91 2474.33,2206.53 2474.33,2159.05 C6.2 ; U2.18 2472.95,2714.95 2480,2722 2495,2722 2503.62,2730.62 C22.2 C22.2@2510,2773.38 ; U2.12 2572.28,2521.8 2658.43,2521.8 C7.2
  Top Layer w15: v1(2205,2902) 2204.32,2901.32 2204.32,2832.68 C3.2 ; C5.2 2206.13,2749.49 2206.13,2829.51 C3.2 ; C11.2 2272.56,2832 C3.2 ; C22.2@2510,2773.38 v1(2510,2827) ; C7.2 2662.69,2520.69 2725.31,2520.69 v1(2728,2518)
  Top Layer w20: USB.12 1332.05,2249.95 1343.09,2238.91 1343.09,2203.91 v1(1345,2202) ; USB.1 1297.05,2494.05 v1@1343.76,2540.76
  Top Layer w25: C15.2 1172.07,2056.43 1173.65,2058 1175,2058 v1(1175.31,2057.69) 1254.69,2057.69 R4.2 ; C23.2 1211.57,2675.43 v1(1345,2542) ; C13.2 v1(1390,3400) ; R2.1 v1(1455,2317) ; R1.1 v1(1455,2452) ; C14.2 1434.31,3094.31 1434.31,3030.69 v1(1435,3030) ; C16.2 1552.5,2228.37 ; v1(1555,2175) 1554.04,2175.96 1554.04,2226.82 1552.5,2228.37 ; C17.2 1552.5,2228.37 ; C18.2 1595,2456.32 ; v1(1595,2497) 1595,2456.32 ; v1(1615,3155) U1.5 ; LDO.1 1697.63,2456.32 1595,2456.32 ; C2.2 1740,2896.38 ; v1(1740,2835) 1740,2896.38 ; C1.2 1740,2896.38 ; U1.1 1815,3205.61 1816.28,3204.33 C9.2 ; C9.2@1919.66,3204.68 C9.2 ; C10.2 2004.66,3204.66 2074.66,3204.66 v1(2075,3205) ; C10.2 C9.2 ; RESETPB.4 2038.84,1997.81 2049.67,1997.81 2086.52,1960.96 2089.04,1960.96 v1(2090,1960) ; C4.2 v1(2035,2302) ; v1(2275,2152) R7.1 ; v1(2480,2087) 2480.69,2087.69 2480.69,2151.31 C6.2 ; v1(2655,2127) C8.2 ; C21.2 2824.31,2327.69 2824.31,2404.31 v1(2825,2405) ; C20.2 2824.31,2456.31 v1@2824.31,2405
  Top Layer w40: LDO.1 1716.26,2457.55 LDO.1@1716.57,2457.87
IRQ3: P2.1 U2.9 | length 746.2
  Top Layer w10: U2.9 2608.84,2461.84 2637,2490 2860,2490 2870,2480 2870,2230 2995,2105 P2.1
LCD_DC: P2.10 U2.42 | length 1122.7
  Top Layer w10: U2.42 2172.47,2422.47 2235,2485 2405,2485 2925,3005 P2.10
LCD_RST: P2.11 U2.38 | length 1131.5
  Top Layer w10: U2.38 2396.21,2501.21 P2.11
MISO2: U1.10 U2.35 U2.37 | length 858.4
  Top Layer w10: U1.10 1615,2924.64 1979.38,2560.27 U2.35 2154.73,2560.27 2165,2550 2165,2530 2155.9,2520.9 U2.37
MISO3: P2.2 U2.52 | length 872.6
  Top Layer w10: U2.52 2256.42,2291.01 2275,2309.59 v1(2275,2315)
  Bottom Layer w10: v1(2275,2315) 2278.83,2318.83 2288.68,2318.83 2290.86,2321 2884,2321 P2.2
MOSI1: P2.9 U2.23 | length 862.7
  Top Layer w10: U2.23 2374.53,2859.53 2465,2950 v1(2510,2950)
  Bottom Layer w10: v1(2510,2950) 2955,2950 P2.9
MOSI2: R11.2 U1.9 U2.36 | length 796.5
  Top Layer w10: U1.9 1565,2924.53 1745.59,2743.94 R11.2 ; R11.2@1745.59,2736.06 1941.07,2540.58 U2.36
MOSI3: P2.3 U2.53 | length 848.3
  Top Layer w10: U2.53 2276.1,2261.1 2320,2305 v1(2320,2355)
  Bottom Layer w10: v1(2320,2355) 2323.86,2355 2335.86,2343 2962,2343 P2.3
NetBOOT0PB_1: BOOT0PB.1 R7.2 U2.60 | length 271.9
  Top Layer w10: BOOT0PB.1 2371.65,2043.65 2413.9,2085.9 2413.9,2155.76 ; R7.2 2385.4,2155.76 2413.9,2155.76 ; U2.60 2413.9,2155.76
NetC1_1: C1.1 U1.13 | length 66.2
  Top Layer w15: U1.13 U1.13@1771.28,3001.44 ; U1.13@1771.28,2996.44 1771.28,2950.89 1778.54,2943.62 C1.1
NetC2_1: C2.1 U1.12 | length 66.2
  Top Layer w15: C2.1 1701.46,2943.62 1708.72,2950.89 U1.12@1708.72,2996.44 ; U1.12@1708.72,3001.44 U1.12
NetC11_1: C11.1 U2.30 | length 117.5
  Top Layer w10: U2.30 2236.73,2712.87 2242.59,2718.73 2274.14,2718.73 2280,2724.59 C11.1
NetC19_2: C19.2 L1.2 R8.1
NetL1_1: L1.1 R5.2 | length 115
  Top Layer w50: R5.2@2200,3395 L1.1
NetR1_2: R1.2 USB.3 | length 72.6
  Top Layer w10: USB.3 1334.37,2440.9 R1.2@1335.47,2442
NetR2_2: R2.2 USB.9 | length 81.7
  Top Layer w10: USB.9 1329.72,2322.79 R2.2@1340.47,2312.04
NRST: C12.1 P1.1 R3.2 RESETPB.1 U2.7 | length 1381.3
  Top Layer w10: P1.1 1885,1995 1965,1915 2263.86,1915 ; R3.2 2145.26,2078.38 C12.1 2205.69,2077.69 2274.31,2077.69 2295,2057 2295,1973.14 2263.86,1942 2263.86,1915 ; RESETPB.1 2249.17,1879.01 2263.86,1893.69 2263.86,1915 ; v1(2485,2290) 2485,2395 2511.57,2421.57 2570.47,2421.57 U2.7
  Bottom Layer w10: v1(2275,2077) 2275,2078.5 2485,2288.5 v1(2485,2290)
NSS1: P2.12 U2.20 | length 885.9
  Top Layer w10: U2.20 2434.49,2677.47 2434.49,2640.86 2440.35,2635 2505,2635 2904.65,3034.65 2904.65,3109.65 P2.12
NSS3: P2.4 U2.50 | length 931.3
  Top Layer w10: U2.50 2217.05,2352.05 v1(2245,2380)
  Bottom Layer w10: v1(2245,2380) 2960.66,2380 2985.66,2405 P2.4
RCVROSC1: C13.1 U1.6 Y1.1 Y1.4 | length 516.7
  Top Layer w15: Y1.4 Y1.4@1287.99,3296.38
  Top Layer w20: C13.1 1548.62,3296.38 1565,3280 U1.6
  Top Layer w25: Y1.4@1287.99,3296.38 C13.1
  Top Layer w40: Y1.1 Y1.4
RCVROSC2: C14.1 U1.7 Y1.2 Y1.3 | length 507.9
  Top Layer w25: Y1.3 C14.1 1386.38,3186.38 1422.28,3222.28 U1.7
  Top Layer w40: Y1.2 Y1.3
RCVRTANK1: R5.1 U1.2 | length 293.7
  Top Layer w50: U1.2 1765,3280.71 1874.29,3390 R5.1@1955,3390
RCVRTANK2: C19.1 U1.4 | length 849.8
  Top Layer w50: U1.4 1665,3365 1885,3585 C19.1
RCVRTANK3: R8.2 U1.14 | length 590.4
  Top Layer w25: U1.14 1815,3008.72 1816.28,3010 2155,3010 2285,3140 R8.2@2285,3205
SCK1: P2.8 U2.21 | length 805.9
  Top Layer w10: U2.21 2413.9,2843.9 2460,2890 v1(2510,2890)
  Bottom Layer w10: v1(2510,2890) 2915,2890 P2.8
SCK2: R10.1 U1.8 U2.34 | length 879.1
  Top Layer w10: U1.8 1515,2925 1595.59,2844.41 R10.1 v1(1645,2795) ; v1(2050,2640) 2050,2604.4 2074.45,2579.95 U2.34
  Bottom Layer w10: v1(1645,2795) 1895,2795 v1(2050,2640)
SCK3: P2.5 U2.51 | length 970.4
  Top Layer w10: U2.51 2236.73,2326.73 2285,2375 v1(2285,2430)
  Bottom Layer w10: v1(2285,2430) 2335,2480 2960.66,2480 2985.66,2505 P2.5
STMD+: U2.45 USB.6 USB.7 | length 887.9
  Top Layer w10: USB.6 USB.7 1379.75,2362.16 1389.59,2372 v1(1395,2372) ; v1(2035,2357) 2040.41,2357 2046.83,2363.42 U2.45
  Bottom Layer w10: v1(1395,2372) 2014.59,2372 2029.59,2357 v1(2035,2357)
STMD-: U2.44 USB.5 USB.8 | length 1025.5
  Top Layer w10: USB.8 1229.53,2342.47 1215,2357 1215,2387 1229.53,2401.53 USB.5 1325.06,2401.53 1329.59,2397 v1(1335,2397) ; v1(2035,2422) 2035,2416.63 2068.53,2383.1 U2.44
  Bottom Layer w10: v1(1335,2397) 1335.08,2397 1360.08,2422 v1(2035,2422)
STMOSCIN: C21.1 U2.5 Y2.2 | length 228.4
  Top Layer w10: U2.5 2632.87,2383.1 2661.38,2354.6 Y2.2 2708.62,2354.6 2726.22,2337 2766.61,2337 2776.38,2327.24 C21.1
STMOSCOUT: C20.1 U2.6 Y2.1 | length 227.6
  Top Layer w10: U2.6 2634.76,2402.79 2661.38,2429.4 Y2.1 2702.6,2447 2766.61,2447 2776.38,2456.76 C20.1
SWCLK: P1.3 U2.49 | length 765.3
  Top Layer w10: v1(2160,2222) 2196.46,2222 2197.36,2222.91 U2.49
  Bottom Layer w10: P1.3 1695,2100 2141.79,2100 2160,2118.21 v1(2160,2222)
SWDIO: P1.2 U2.46 | length 842
  Top Layer w10: U2.46 2118.76,2343.87 2179.87,2343.87 v1(2180,2344)
  Bottom Layer w10: P1.2 1780,2085 2149,2085 2175,2111 2175,2182 2195,2202 2195,2252 2180,2267 v1(2180,2344)
USB5V: C9.1 C10.1 C16.1 C17.1 C23.1 LDO.3 P2.14 R10.2 R11.1 U1.3 USB.2 USB.11 | length 5344.5
  Top Layer w10: 1500,2750 1510,2740 R11.1@1689.41,2740 ; 1510,2795 R10.2
  Top Layer w15: USB.2 1260.57,2461.78 1224.78,2461.78 1185,2422 1185,2327 1229.78,2282.22 1260.57,2282.22 USB.11 1265.22,2277.56 1508.08,2277.56 C16.1
  Top Layer w25: v1(1510,2850) 1510,2795 C16.1 C17.1 ; C17.1 1595.41,2276.04 1698.44,2276.04 LDO.3 1788.55,2276.45 1950,2115 v1(1950,2010) ; v1(1715,3100) 1715,3157.04 ; U1.3 1715,3157.04 ; C9.1 1715,3157.04 ; C9.1@1919.33,3157.07 C10.1
  Top Layer w40: C23.1 1500,2750
  Bottom Layer w25: v1(1510,2850) 1510,2895 v1(1715,3100) ; v1(1950,2010) 3060,2010 3090,2040 3090,3315 P2.14
USBSHLD: C15.1 R4.1 USB.S1 USB.S2 USB.S3 USB.S4 USB.S5 USB.S6 | length 830.5
  Top Layer w25: C15.1 1100,2199.87 USB.S6 ; USB.S3 USB.S5 USB.S1 USB.S2 USB.S6 ; R4.1 1255,2195.46 USB.S4 USB.S6
pads on no net: BOOT0PB.2 BOOT0PB.3 P2.6 RESETPB.2 RESETPB.3 U1.11 U2.2 U2.3 U2.4 U2.8 U2.10 U2.11 U2.14 U2.15 U2.16 U2.17 U2.22 U2.24 U2.25 U2.26 U2.27 U2.28 U2.29 U2.33 U2.39 U2.40 U2.41 U2.43 U2.54 U2.55 U2.56 U2.57 U2.58 U2.59 U2.61 U2.62 USB. USB.4 USB.10

## Polygon pours and split planes (outlines as drawn)
NetC19_2 on Top Layer "NONET_L-01_P-001" (solid, pour order 0): 2360,3630 2435,3630 2435,3160 2360,3160
GND on GND Layer (split plane): 6179.9,1820.1 1020.1,1820.1 1020.1,3679.9 6179.9,3679.9
3V3 on 3V3 Layer (split plane): 6179.9,1820.1 1020.1,1820.1 1020.1,3679.9 6179.9,3679.9

## Silkscreen, mask and mechanical layers (free items; w line width, h text height)
Top Overlay:
  circle w15: c1865,3225 r3
  text "GND" at 1336,2071 h40
  text "CLK" at 1536,2071 h40
  text "RST" at 1736,2071 h40
  text "RST" at 1916,1921 h40
  text "BOOT0" at 2586,1921 h40
  text "3V3" at 1441,1881 h40
  text "DIO" at 1641,1881 h40
Mechanical 1:
  the board outline again, w10